# Altium PCB OneWifiGamePad.PcbDoc
Units mm, origin at the board's own origin, x right, y up, seen from the top; angles counter-clockwise.
Board outline 110.8 x 30 mm, 2 copper layers (Top Layer, Bottom Layer); 43 components, 31 nets, 135 pads, 62 vias.
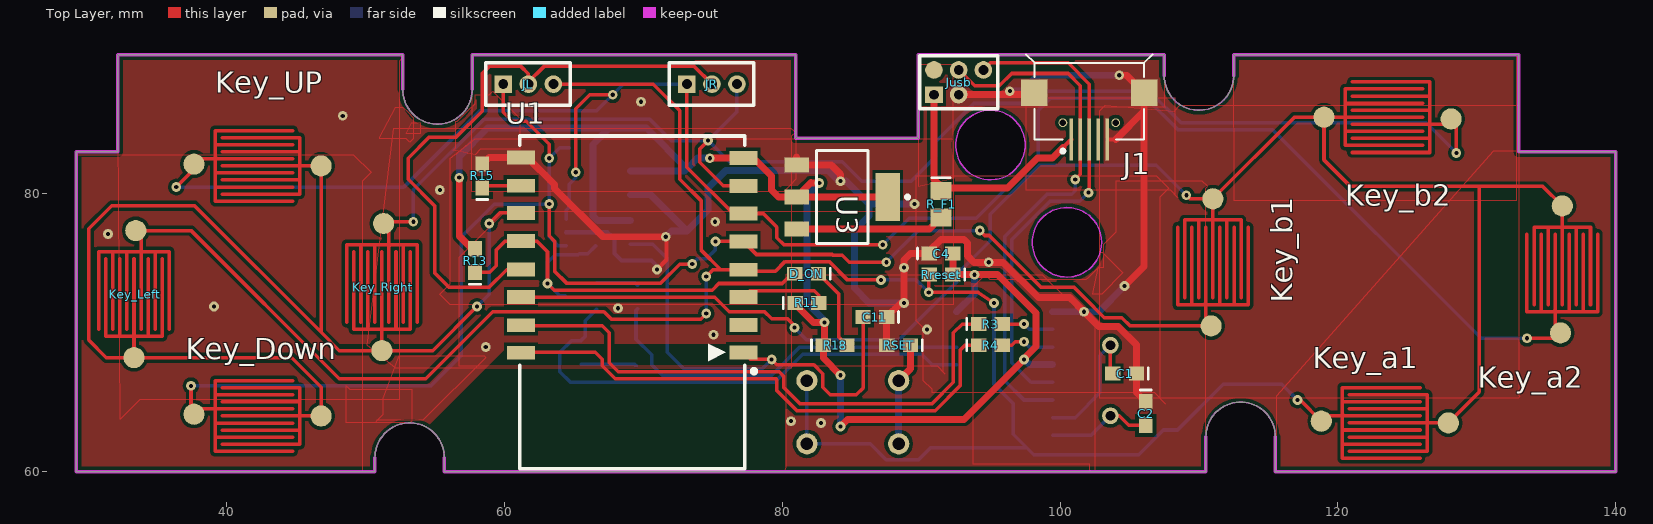
[diagram p0: Top Layer view]
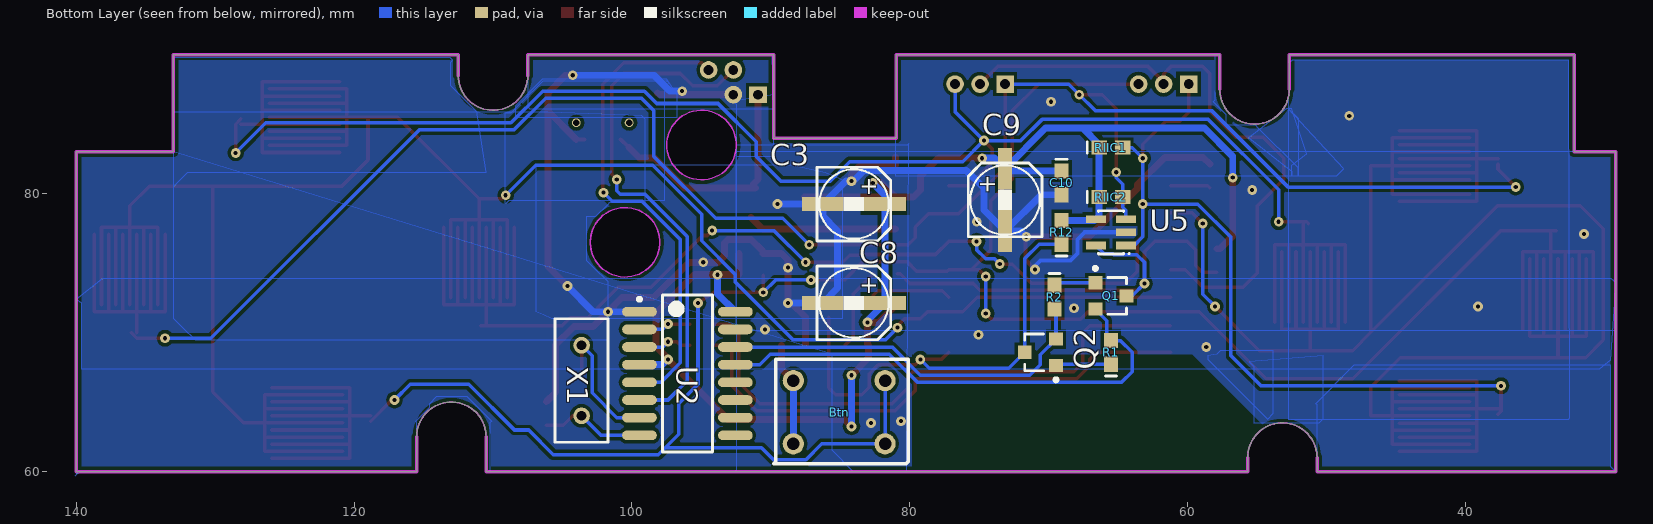
[diagram p1: Bottom Layer view, seen from below]

## Layer stack, top to bottom
Top Layer: signal copper 0.0356
Dielectric: dielectric 0.32, FR-4, Dk 4.8
Bottom Layer: signal copper 0.0356

## Board outline
29.2,83 32.2,83 32.2,90 52.7,90 52.7,87.5 ccw(c55.2,87.5) 57.7,87.5 57.7,90 81,90 81,84 89.8,84 89.8,90 107.5,90 107.5,88.5 ccw(c110,88.5) 112.5,88.5 112.5,90 133,90 133,83 140,83 140,60 115.5,60 115.5,62.5 ccw(c113,62.5) 110.5,62.5 110.5,60 55.7,60 55.7,61 ccw(c53.2,61) 50.7,61 50.7,60 29.2,60
cut-out: 97.988,76.5 98.036,76.01 98.179,75.539 98.411,75.104 98.724,74.724 99.104,74.411 99.539,74.179 100.01,74.036 100.5,73.988 100.99,74.036 101.461,74.179 101.896,74.411 102.276,74.724 102.589,75.104 102.821,75.539 102.964,76.01 103.012,76.5 102.964,76.99 102.821,77.461 102.589,77.896 102.276,78.276 101.896,78.589 101.461,78.821 100.99,78.964 100.5,79.012 100.01,78.964 99.539,78.821 99.104,78.589 98.724,78.276 98.411,77.896 98.179,77.461 98.036,76.99
cut-out: 92.488,83.5 92.536,83.01 92.679,82.539 92.911,82.104 93.224,81.724 93.604,81.411 94.039,81.179 94.51,81.036 95,80.988 95.49,81.036 95.961,81.179 96.396,81.411 96.776,81.724 97.089,82.104 97.321,82.539 97.464,83.01 97.512,83.5 97.464,83.99 97.321,84.461 97.089,84.896 96.776,85.276 96.396,85.589 95.961,85.821 95.49,85.964 95,86.012 94.51,85.964 94.039,85.821 93.604,85.589 93.224,85.276 92.911,84.896 92.679,84.461 92.536,83.99

## Design rules (kind name [scope] priority, off if disabled: settings)
Clearance [All] p1: gap=0.254
PolygonConnect [All] p1: connectstyle=Direct reliefconductorwidth=0.254 reliefentries=4 polygonreliefangle="90 Angle"
RoutingVias RoutingVias_VCC [InNetClass('VCCGND')] p1: holewidth=0.711 width=1.27 viastyle="Through Hole" minholewidth=0.3 minwidth=0.7 maxholewidth=0.711 maxwidth=1.27
RoutingVias RoutingVias_msg [All] p2: holewidth=0.3 width=0.7 viastyle="Through Hole" minholewidth=0.3 minwidth=0.7 maxholewidth=0.711 maxwidth=1.27
SilkscreenOverComponentPads [All] p1: minsilkscreentomaskgap=0.254
SolderMaskExpansion [All] p1: expansion=0.102
Width Width_GNDVCC [InNetClass('gndVcc')] p1: maxlimit=0.5 minlimit=0.3 preferedwidth=0.5
Width Width_ALL [All] p2: maxlimit=0.5 minlimit=0.254 preferedwidth=0.254
27 further rules are at their usual default settings.

## Classes and differential pairs
net class gndVcc: +3V3 GND USBVCC

## Components (designator, comment, footprint, x,y, rotation, side; value= is the part's Value field where it differs from the comment)
Btn "button" SW_6X6 88.392,66.548 r180 bottom locked
C1 "22p" 0603 104.648,67.056 r180 top
C2 "22p" 0603 106.172,64.174 r270 top
C3 "10uF" smd-ec-f5 81.788,79.248 r0 bottom
C4 "100n" 0603 91.44,75.692 r0 top
C8 "10V" smd-ec-f5 81.788,72.136 r0 bottom locked
C9 "10V" smd-ec-f5 73.152,81.788 r270 bottom
C10 "Cap" 0603 69.088,80.772 r270 bottom
C11 "104" 0603 86.68,71.12 r180 top
D_ON "LED2" 0603 81.771,74.232 r180 top
J1 "Micro-USB" MICRO_USB_B 102.108,89.408 r90 top
JL "CONJ-3" SIP-3 59.944,87.884 r90 top
JR "CONJ-3" SIP-3 73.152,87.884 r90 top
Jusb "CONJ-5" SIP-5 90.932,88.9 r0 top
Key_a1 "SW-PB" GAMEPAD 123.5,63.5 r180 top locked
Key_a2 "SW-PB" GAMEPAD 136.144,74.676 r270 top locked
Key_b1 "SW-PB" GAMEPAD 111,75.184 r270 top locked
Key_b2 "SW-PB" GAMEPAD 123.444,85.5 r0 top locked
Key_Down "SW-PB" GAMEPAD 42.38,64 r180 top locked
Key_Left "SW-PB" GAMEPAD 33.363,72.644 r90 top locked
Key_Right "SW-PB" GAMEPAD 51.2,73.152 r90 top locked
Key_UP "SW-PB" GAMEPAD 42.38,82 r180 top locked
Q1 "S8050" sot23-3 65.532,72.644 r270 bottom
Q2 "S8050" sot23-3 70.612,68.58 r90 bottom
R1 "10K" 0603 65.532,68.58 r90 bottom
R2 "10K" 0603 69.596,72.55 r270 bottom
R3 "470" 0603 94.996,70.612 r0 top
R4 "470" 0603 94.996,69.088 r0 top
R11 "10K" 0603 81.788,72.136 r0 top
R12 "10K" 0603 69.088,77.216 r90 bottom
R13 "20K" 0603 57.912,75.184 r90 top
R15 "1K" 0603 58.42,81.28 r90 top
R18 "10K" 0603 83.82,69.088 r0 top
R_F1 "0.5A" 0805 91.44,79.248 r270 top
RIIC1 "10k" 0603 65.532,83.312 r180 bottom
RIIC2 "10k" 0603 65.532,79.756 r180 bottom
Rreset "10k" 0603 91.44,74.168 r180 top
RSET "Res2" 0603 88.392,69.088 r180 top
U1 "ESP-12" ESP_12 77.216,68.58 r180 top locked
U2 "CH340" SOP127P762-16M 96.012,67.056 r180 bottom locked
U3 "AMS1117" SOT-223 84.328,79.756 r270 top
U5 "at24c02" sot-23-5 65.532,77.216 r90 bottom
X1 "osc-2" RAD-0.2 103.632,66.548 r90 bottom locked

## Footprints (in the part's own frame and the unit in brackets; to place one, negate y for a bottom-side part, rotate by r counter-clockwise, add the part's x,y. Pads: shape width x height; smd on the part's side, far side on the other; paste and mask are expansions set on the pad)
0603 [mm] "Chip Capacitor; Body 1.6 x 0.8 mm (LxW typ)"
  rect 1.1x1 smd: 1(-0.85,0) 2(0.85,0)
  silkscreen extent -1.7,-0.4 -1.7,0.4
0805 [mm] "Chip Capacitor; Body 2.0 x 1.2 mm (LxW typ)"
  rect 1.3x1.5 smd: 1(-0.95,0) 2(0.95,0)
  silkscreen extent -1.9,-0.65 -1.9,0.65
ESP_12 [mm]
  rect 2x1 smd: 1(0,0) 2(0,-1.97) 3(0,-3.97) 4(0,-5.94) 5(0,-7.98) 6(0,-9.99) 7(0,-11.98) 8(0,-13.99) 9(16,-14.03) 10(16,-11.99) 11(16,-10.03) 12(16,-8.01) 13(16,-5.95) 14(16,-3.97) 15(16,-1.95) 16(16,0.03)
  silkscreen extent -0.91,-15.57 16.08,8.37
GAMEPAD [mil] "game pad"
  round 60 smd: 1(-175,0) 2(185,-5)
  Top Layer lines w10: 185,-20 125,-20 ; 125,50 125,100 -95,100 ; 125,0 125,-35 ; 125,-15 125,60 -95,60 ; 120,20 -95,20 ; 105,80 -90,80 -115,80 -115,-40 ; 105,40 -115,40 ; 105,0 -115,0 -175,0 ; 105,-40 -115,-40 ; 105,-80 -115,-80 -115,-40 ; -95,-20 120,-20 125,-25 125,-60 ; -95,-60 125,-60 ; -95,-100 125,-100 125,-60
MICRO_USB_B [mm] "5P 贴片 带定位柱"
  rect 3x0.25 smd: 1(-5.508,1.3) 2(-5.508,0.65) 3(-5.508,0) 4(-5.508,-0.65) 5(-5.508,-1.3)
  rect 1.9x1.9 smd: 6(-2.15,3.95) 6(-2.15,-3.95)
  round 0.635 hole 0.457 unplated: MH1(-4.3,1.9) MH2(-4.3,-1.9)
  silkscreen extent -6.47,-4.57 0.63,4.57
RAD-0.2 [mm] "Radial Cap, Thru-Hole; 2 Leads; 0.2 in Pin Spacing"
  round 1.2 hole 0.7: 1(-2.54,0) 2(2.54,0)
  silkscreen extent -4.44,-1.91 4.44,1.91
SIP-3 [mm] "sip-3"
  rect 1.27x1.27 hole 0.7: 1(0,0)
  round 1.27 hole 0.7: 2(0,-1.8) 3(0,-3.6)
  silkscreen extent -1.52,-4.83 1.52,1.27
SIP-5 [mm] "SIP5"
  rect 1.27x1.2 hole 0.7: 1(0,-1.778)
  round 1.27 hole 0.7: 2(1.778,0) 3(3.556,0) 5(1.778,-1.778)
  round 1.27 smd: 4(0,0)
  silkscreen extent -1.02,-2.79 4.57,1.02
smd-ec-f5 [mm]
  rect 3x1 smd: 1(0,0) 2(4.477,0)
  silkscreen extent -0.41,-2.65 4.89,2.66
SOP127P762-16M [mm] "16-Pin Small Outline Package 1.27 mm Pitch"
  oval 2.5x0.7 smd: 1(-3.45,4.445) 2(-3.45,3.175) 3(-3.45,1.905) 4(-3.45,0.635) 5(-3.45,-0.635) 6(-3.45,-1.905) 7(-3.45,-3.175) 8(-3.45,-4.445) 9(3.45,-4.445) 10(3.45,-3.175) 11(3.45,-1.905) 12(3.45,-0.635) 13(3.45,0.635) 14(3.45,1.905) 15(3.45,3.175) 16(3.45,4.445)
  silkscreen extent -3.57,-5.65 1.8,5.65, body extent -2.85,-5.65 2.85,5.65, height 2.2
sot23-3 [mm] "SOT-23; 3 Leads; Body 3.0 x 2.5 mm, inc. leads (LxW max)"
  rect 0.95x1 smd: 1(-0.95,-1.125) 2(0.95,-1.125) 3(0,1.125)
  silkscreen extent -2.1,-1.25 1.33,1.13
sot-23-5 [mm] "SOT-23/SC-74A; 5 Leads; Body 3 x 3.1 mm, inc. leads (LxW max)"
  rect 0.55x1.45 smd: 1(-0.95,-1.075) 2(0,-1.075) 3(0.95,-1.075) 4(0.95,1.075) 5(-0.95,1.075)
  silkscreen extent -1.57,-1.35 1.55,0.9
SOT-223 [mm] "SOT-223/SC-73; 4 Leads; Body 6.7 x 7.3 mm, inc. leads (LxW max)"
  rect 1.1x1.75 smd: 1(-2.3,-3.275) 2(0,-3.275) 3(2.3,-3.275)
  rect 3.45x1.75 smd: 4(0,3.275)
  silkscreen extent -3.35,-1.85 3.35,4.83
SW_6X6 [mm] "6x6 touch switch"
  round 1.524 hole 0.9: 1(0,0) 2(0,-4.55) 3(6.6,-4.55) 4(6.6,0)
  silkscreen extent -1.4,-5.97 8.25,1.52

## Part data
C1 C2 C4 C11: library part Cap, "Capacitor"
C3 C8 C9: library part "Cap Pol1", "Polarized Capacitor (Radial)"
C10: "Capacitor"
D_ON: "Typical RED, GREEN, YELLOW, AMBER GaAs LED"
Key_a1 Key_a2 Key_b1 Key_b2 Key_Down Key_Left Key_Right Key_UP: "Switch"
Q1 Q2: library part NPN_23-3
R1 R2 R3 R4 R11 R12 R13 R15 R18 R_F1 RIIC1 RIIC2 Rreset: library part Res2, "Resistor"
RSET: "Resistor"
U2: library part RS232, "RS232"

## Via types
v1: diameter 0.7, hole 0.3, Top Layer to Bottom Layer, 62 vias

## Nets (pads, with @x,y where several pads share a name; then routed paths per layer and width w, separated by ;. In a path a pad name is that pad's centre, name@x,y a point inside that pad or via, vN(x,y) a via of type N, cw(c..) or ccw(c..) an arc to the next point about the centre after c; other vN are vias at no path point)
+3V3: C3.1 C4.2 C8.1 C9.1 C10.1 R11.1 R12.2 R13.2 R18.1 RIIC1.1 RIIC2.1 Rreset.1 U1.8 U2.4 U2.16 U3.2 U3.4 U5.4 | length 112.8
  Top Layer w0.5: v1(56.769,81.153) 56.769,76.962 57.697,76.034 R13.2 ; v1@74.823,82.57 U1.8 77.958,82.57 79.248,81.28 79.248,80.264 79.756,79.756 U3.2 ; R11.1 80.938,72.073 82.272,70.739 v1(83.058,70.739) 83.058,69.176 R18.1 82.97,68.16 v1(84.201,66.929) ; v1@82.337,80.772 v1(82.677,80.772) 82.108,80.772 82.089,80.792 U3.2 ; v1(84.201,63.246) 84.713,63.758 93.095,63.758 v1(97.409,68.072) 97.409,68.134 98.263,68.988 98.263,71.417 95.512,74.168 v1(93.853,74.168) Rreset.1 C4.2 ; U3.4 U3.2
  Bottom Layer w0.5: v1(56.769,81.153) 56.769,82.677 58.801,84.709 67.564,84.709 ; R12.2 66.707,78.066 66.382,78.391 66.382,80.264 66.382,82.296 66.382,83.527 67.564,84.709 ; C10.1 C9.1@72.986,81.622 ; v1(74.803,82.55) 73.914,82.55 C9.1 70.231,84.709 67.564,84.709 ; v1(82.677,80.772) 81.788,79.883 C3.1 C8.1 83.058,70.866 v1(83.058,70.739) ; v1(84.201,63.246) v1(84.201,66.929) ; U2.16 93.853,72.792 v1(93.853,74.168) ; v1(97.409,68.072) 97.79,67.691 U2.4
ADC: U1.2
D2: Btn.3 Btn.4 JL.3 Key_a1.2 Key_Left.2 Rreset.2 U1.4 | length 153.9
  Top Layer w0.254: Key_Left.2 37.465,77.343 48.133,66.675 54.356,66.675 59.182,71.501 67.183,71.501 67.723,70.961 74.136,70.961 v1(74.549,71.374) ; JL.3 70.739,87.884 72.644,85.979 72.644,81.026 74.168,79.502 74.168,75.946 75.594,74.52 ; v1(74.549,74.041) 75.028,74.52 75.594,74.52 ; v1(87.122,73.787) 84.709,73.787 83.383,75.113 80.214,75.113 79.523,74.422 77.314,74.422 U1.4 75.594,74.52 ; Rreset.2@90.551,74.129 v1(90.551,72.898) 94.107,72.898 v1(95.25,72.136) ; v1(117.094,65.151) 117.277,65.151 Key_a1.2
  Bottom Layer w0.254: v1(74.549,71.374) v1(74.549,74.041) ; Btn.4 Btn.3 86.338,61.998 87.481,60.855 89.818,60.855 90.685,61.722 97.591,61.722 ; v1(87.122,73.787) 89.662,73.787 v1(90.551,72.898) ; v1(95.25,72.136) 95.25,66.294 96.647,64.897 96.647,62.676 98.109,61.214 105.664,61.214 107.442,62.992 108.458,62.992 111.76,66.294 115.951,66.294 v1(117.094,65.151)
D3: Key_a1.1 Key_a2.1 Key_b1.1 Key_b2.1 U1.14 | length 109.3
  Top Layer w0.254: U1.14 75.151,72.55 76.2,71.501 78.74,71.501 79.248,70.993 80.391,70.993 80.899,70.485 v1(80.899,70.358) ; v1(109.093,79.883) 109.347,79.629 Key_b1.1 116.871,85.5 Key_b2.1 118.999,82.423 120.904,80.518 130.175,80.518 ; Key_a1.1 130.175,65.73 130.175,80.518 ; Key_a2.1 134.747,80.518 130.175,80.518
  Bottom Layer w0.254: v1(80.899,70.358) 81.788,69.469 88.392,69.469 92.583,73.66 92.583,74.201 94.98,76.597 94.98,78.513 98.503,82.036 100.959,82.036 100.965,82.042 ; 100.424,82.042 106.934,82.042 v1(109.093,79.883)
D4: JL.2 JR.2 U1.13 | length 44.4
  Top Layer w0.254: U1.13 60.179,74.53 58.909,73.26 56.026,73.26 54.991,74.295 54.991,79.121 53.086,81.026 53.086,82.55 54.61,84.074 56.555,84.074 58.42,85.939 58.42,88.646 58.928,89.154 61.214,89.154 61.744,88.624 JL.2@61.744,88.033 ; JL.2 JL.2@61.744,88.033 ; JR.2 74.952,87.893 73.691,89.154 62.865,89.154 JL.2@61.744,88.033
D5: JL.1 Key_b1.2 Key_Down.2 RIIC1.2 U1.5 U5.1 | length 113
  Top Layer w0.254: v1(37.465,66.167) 37.465,64.343 Key_Down.2 ; JL.1 59.944,85.852 60.579,85.217 61.595,85.217 63.246,83.566 v1(63.246,82.55) ; v1(63.246,79.248) 63.246,76.962 63.627,76.581 63.627,74.422 64.483,73.566 71.28,73.566 72.644,74.93 v1(73.533,74.93) ; v1(75.205,76.56) U1.5 78.155,75.621 83.594,75.621 ; 83.649,75.565 84.328,75.565 84.836,75.057 v1(87.503,75.057) ; v1(94.234,77.343) 94.588,76.989 94.896,76.989 98.606,73.279 100.983,73.279 102.458,71.804 102.458,71.786 103.175,71.069 104.449,71.069 105.032,70.485 Key_b1.2
  Bottom Layer w0.254: v1(37.465,66.167) 54.737,66.167 56.896,68.326 56.896,76.853 59.291,79.248 v1(63.246,79.248) ; U5.1 63.868,76.266 63.246,76.888 v1(63.246,79.248) ; RIIC1.2 64.008,83.312 v1(63.246,82.55) v1(63.246,79.248) ; v1(73.533,74.93) 73.914,75.311 74.549,75.311 75.205,75.967 v1(75.205,76.56) ; v1(87.503,75.057) 89.789,77.343 v1(94.234,77.343)
D6: JR.1 Key_a2.2 Key_UP.2 RIIC2.2 U1.6 U5.3 | length 139
  Top Layer w0.254: v1(36.407,80.476) 37.681,81.75 Key_UP.2 ; v1(65.151,81.534) 65.151,86.106 66.167,87.122 v1(67.818,87.122) ; JR.1 73.152,81.902 76.484,78.57 U1.6 78.656,78.57 79.629,77.597 79.629,76.835 80.137,76.327 v1(87.249,76.327) ; v1(133.604,69.596) 135.636,69.596 Key_a2.2
  Bottom Layer w0.254: v1(36.407,80.476) 52.79,80.476 58.293,85.979 66.675,85.979 v1(67.818,87.122) 68.58,87.884 JR.1 ; U5.3 64.457,78.808 64.682,79.033 RIIC2.2 ; 64.682,80.264 RIIC2.2 ; v1(65.151,81.534) 65.151,81.153 64.682,80.684 RIIC2.2 ; v1(87.249,76.327) 89.154,78.232 93.98,78.232 98.425,82.677 98.425,85.979 99.314,86.868 106.216,86.868 108.502,84.582 115.316,84.582 130.302,69.596 v1(133.604,69.596)
D7: JR.3 Key_b2.2 Key_Right.2 U1.7 | length 101.8
  Top Layer w0.254: Key_Right.2 51.454,77.978 v1(53.467,77.978) ; v1(74.676,83.82) 74.072,83.216 74.072,82.247 75.759,80.56 U1.7 ; Key_b2.2 128.524,84.992 v1(128.524,82.931)
  Bottom Layer w0.254: v1(53.467,77.978) 53.467,80.267 58.54,85.34 70.492,85.34 72.012,83.82 v1(74.676,83.82) ; JR.3 76.752,85.896 v1(74.676,83.82) ; v1(128.524,82.931) 126.365,85.09 108.712,85.09 106.465,87.337 106.426,87.376 99.104,87.376 98.215,86.487 93.806,86.487 91.059,83.74 91.059,82.677 89.281,80.899 85.725,80.899 84.328,82.296 76.2,82.296 v1(74.676,83.82)
D8: D_ON.2 Q1.3 R13.1 U1.12 U5.5 | length 35.1
  Top Layer w0.254: R13.1 58.967,74.334 59.436,74.803 59.436,75.946 60.08,76.59 U1.12 62.348,76.59 63.119,75.819 v1(63.119,73.533) 63.594,73.058 74.963,73.058 75.438,73.533 80.01,73.533 80.709,74.232 D_ON.2
  Bottom Layer w0.254: Q1.3 64.008,72.644 v1(63.119,73.533) 63.119,75.057 63.672,75.61 65.34,75.61 65.396,75.666 66.007,75.666 U5.5
D9: Key_Down.1 Key_Left.1 Key_Right.1 Key_UP.1 U1.11 | length 83.4
  Top Layer w0.254: Key_Down.1 46.825,66.078 44.704,68.199 Key_Left.1 31.369,68.199 30.099,69.469 30.099,77.47 31.75,79.121 37.719,79.121 46.825,70.015 ; Key_UP.1 46.825,70.015 ; v1(58.039,71.882) 54.864,68.707 Key_Right.1 48.133,68.707 46.825,70.015 ; v1(58.928,77.851) 59.687,78.61 U1.11
  Bottom Layer w0.254: v1(58.039,71.882) 58.928,72.771 v1(58.928,77.851)
D+: J1.3 Jusb.3 U2.5 | length 35.6
  Top Layer w0.254: Jusb.3 94.996,89.408 100.584,89.408 102.108,87.884 J1.3 102.108,80.137 v1(102.044,80.073)
  Bottom Layer w0.254: U2.5 97.917,66.421 96.52,67.818 96.52,76.701 99.275,79.456 101.427,79.456 v1(102.044,80.073)
D-: J1.2 Jusb.2 U2.6 | length 38.6
  Top Layer w0.254: Jusb.2 93.853,87.757 95.631,87.757 96.52,88.646 100.584,88.646 101.458,87.772 J1.2 101.458,81.392 v1(101.092,81.026)
  Bottom Layer w0.254: U2.6 97.409,65.151 96.012,66.548 96.012,76.911 99.065,79.964 100.838,79.964 101.092,80.218 v1(101.092,81.026) v1@101.154,81.026
DTR: Q1.2 R1.2 U2.13 | length 36
  Bottom Layer w0.254: Q1.2 65.825,70.862 65.825,69.723 R1.2 64.858,69.43 64.008,68.58 64.008,67.183 64.77,66.421 73.069,66.421 79.458,66.421 81.49,68.453 90.043,68.453 90.805,67.691 U2.13
EN: R11.2 U1.3 | length 6.3
  Top Layer w0.254: U1.3 77.683,73.017 82.304,73.017 82.638,72.683 R11.2
GND: C1.1 C2.1 C3.2 C4.1 C8.2 C9.2 C10.2 C11.1 J1.5 J1.6 Jusb.5 R15.2 RSET.2 U1.9 U2.1 U3.1 U5.2 | length 141.5
  Top Layer w0.3: v1(70.993,74.549) 71.688,75.244 71.688,76.836 v1(71.628,76.896) ; J1.5 104.013,83.9
  Top Layer w0.5: R15.2 58.9,82.61 U1.9 61.662,82.61 63.627,80.645 63.627,80.372 67.102,76.896 v1(71.628,76.896) ; 81.053,82.65 U3.1 83.539,82.056 84.201,81.394 v1(84.201,80.899) ; RSET.2@87.53,69.1 C11.1 88.546,72.136 v1(88.773,72.136) 88.773,75.223 89.242,75.692 C4.1 90.59,75.858 91.428,76.696 93.103,76.696 93.345,76.454 93.345,75.53 93.818,75.057 95.906,75.057 98.446,72.517 100.711,72.517 v1(101.727,71.501) 102.79,70.438 104.187,70.438 105.498,69.127 C1.1 105.498,65.698 C2.1 ; Jusb.5 98.022,87.122 J1.6@98.158,87.258 ; v1@96.393,87.122 v1(96.393,87.376) ; 104.013,83.9 106.058,85.945 ; v1(104.267,88.519) 104.797,88.519 106.058,87.258 106.058,85.945 ; v1(104.648,73.356) 106.058,74.766 106.058,85.945
  Bottom Layer w0.3: U5.2 67.437,77.216 67.945,76.708 67.945,75.692 68.453,75.184 70.612,75.184 70.993,74.803 v1(70.993,74.549)
  Bottom Layer w0.5: C10.2 70.541,79.922 C9.2 ; v1(71.628,76.896) 72.043,77.311 C9.2 ; v1(88.773,72.136) C8.2 85.199,73.202 85.199,77.311 86.265,78.377 C3.2 ; v1(89.535,79.248) C3.2 ; v1(96.393,87.376) 97.282,87.376 98.425,88.519 v1(104.267,88.519) ; U2.1 v1(101.727,71.501) 102.793,71.501 v1(104.648,73.356) ; C9.2 74.676,78.835 74.676,80.391 75.946,81.661 83.312,81.661 84.074,80.899 84.614,80.899 C3.2
  other v1: 82.804,63.5 80.645,63.627 58.674,68.961 75.057,69.85 90.424,70.231 68.199,71.755 39.116,71.882 88.773,74.676 94.869,75.057 31.496,77.089 75.184,77.978 55.372,80.264 48.387,85.598 69.85,86.614
ID: Jusb.4
NetBtn_1: Btn.1 Btn.2 RSET.1 | length 7.4
  Top Layer w0.5: Btn.1 89.242,67.398 RSET.1
  Bottom Layer w0.5: Btn.2 Btn.1
NetD_ON_1: D_ON.1 R18.2 | length 6
  Top Layer w0.254: D_ON.1 84.074,72.779 84.074,69.684 R18.2
NetQ1_1: Q1.1 R2.1 | length 3
  Bottom Layer w0.254: Q1.1 69.402,73.594 R2.1
NetQ2_1: Q2.1 R1.1 | length 4
  Bottom Layer w0.254: R1.1 69.387,67.73 Q2.1
NetR3_2: R3.2 U2.2 | length 3.8
  Top Layer w0.254: R3.2 v1(97.409,70.612)
  Bottom Layer w0.254: v1(97.409,70.612) 97.79,70.231 U2.2
NetR4_2: R4.2 U2.3 | length 3.9
  Top Layer w0.254: R4.2 96.52,69.088 96.774,69.342 v1(97.409,69.342)
  Bottom Layer w0.254: v1(97.409,69.342) 97.79,68.961 U2.3
NetR15_1: R15.1 U1.10 | length 2.9
  Top Layer w0.254: R15.1 58.56,80.57 U1.10
RESET: C11.2 Q2.3 R12.1 U1.1 | length 33.8
  Top Layer w0.254: U1.1 77.724,68.072 v1(79.248,68.072) 79.629,67.691 82.296,67.691 82.935,67.052 82.935,66.071 82.931,66.067 83.466,65.532 85.344,65.532 85.83,66.018 C11.2
  Bottom Layer w0.254: R12.1 70.7,76.366 71.737,75.329 Q2.3 72.881,67.437 78.613,67.437 v1(79.248,68.072)
RTS: Q2.2 R2.2 U2.14 | length 27.6
  Bottom Layer w0.254: R2.2 69.487,71.591 Q2.2 70.612,68.405 70.612,67.691 71.374,66.929 79.248,66.929 81.28,68.961 U2.14
RX: R3.1 U1.15 | length 41.4
  Top Layer w0.254: U1.15@61.261,70.485 67.056,70.485 67.564,69.977 67.564,67.818 68.199,67.183 79.786,67.183 80.137,66.832 80.137,66.04 81.28,64.897 90.805,64.897 92.329,66.421 92.329,69.977 92.964,70.612 R3.1
TX: R4.1 U1.16 | length 38.8
  Top Layer w0.254: U1.16@61.246,68.58 66.548,68.58 67.056,68.072 67.056,67.608 67.989,66.675 79.575,66.675 79.629,66.621 79.629,65.83 81.07,64.389 91.015,64.389 92.837,66.211 92.837,68.763 93.162,69.088 R4.1
USBP: J1.1 Jusb.1 R_F1.1 | length 18.1
  Top Layer w0.3: 100.22,83.312 J1.1
  Top Layer w0.5: Jusb.1 90.932,81.006 91.336,80.602 91.125,80.391 96.231,80.391 98.39,82.55 99.458,82.55 100.22,83.312
USBVCC: R_F1.2 U3.3 | length 10.7
  Top Layer w0.5: U3.3 90.598,77.456 R_F1.2
XI: C1.2 U2.7 X1.2 | length 10.1
  Top Layer w0.254: X1.2@103.632,69.215 X1.2 103.632,67.222 C1.2
  Bottom Layer w0.254: U2.7 101.092,63.881 102.87,65.659 102.87,68.326 X1.2
XO: C2.2 U2.8 X1.1 | length 7.6
  Top Layer w0.254: X1.1 104.267,64.008 104.951,63.324 C2.2
  Bottom Layer w0.254: U2.8 102.235,62.611 X1.1
pads on no net: J1.4 J1.MH1 J1.MH2 U2.9 U2.10 U2.11 U2.12 U2.15

## Polygon pours and split planes (outlines as drawn)
GND on Top Layer "TopLayer-No Net" (solid, shelved): 52.451,68.319 58.554,68.319 58.674,68.199 54.15,63.675 54.069,63.675 50.848,63.675 50.8,63.627 51.308,64.135 51.308,65.278
GND on Top Layer "TopLayer-No Net" (solid, shelved): 115.57,65.405 115.57,60.07 115.5,60 140,60 140,83 139.942,83.058 131.318,83.058 131.191,83.058
GND on Top Layer "TopLayer-No Net" (solid, shelved): 112.5,90 133,90 132.842,89.842 132.842,79.502 112.522,79.502
GND on Top Layer "TopLayer-No Net" (solid, shelved): 108.204,85.945 108.619,86.36 133,86.36 133,65.501 133.096,65.405 132.97,65.279 102.87,65.279 102.87,85.979 103.251,86.36
GND on Top Layer "TopLayer-No Net" (solid, shelved): 97.536,86.868 97.536,80.293 107.919,80.293 108.432,79.756 108.303,79.89 108.303,86.868
GND on Top Layer "TopLayer-No Net" (solid, shelved): 90.17,70.358 89.662,70.866 89.662,81.28 106.934,81.28 107.823,80.391 107.188,79.756 107.188,68.961 107.188,65.278 107.569,64.897 106.807,65.659 90.812,65.659 90.812,65.906 90.17,66.548
GND on Top Layer "TopLayer-No Net" (solid, shelved): 92.329,81.102 92.329,89.281 89.927,89.281 89.8,89.408 89.789,89.397 89.789,80.518
GND on Top Layer "TopLayer-No Net" (solid, shelved): 89.916,89.916 90,90 107.5,90 107.5,86.302 107.58,86.222 107.569,86.233 89.8,86.233
GND on Top Layer "TopLayer-No Net" (solid, shelved): 102.743,74.676 102.892,74.825 102.892,75.774 103.042,75.774 104.521,74.295 102.997,72.771 102.362,72.771
GND on Top Layer "TopLayer-No Net" (solid, shelved): 102.108,60.579 102.108,60.127 102.235,60 110.5,60 110.5,80.401 110.617,80.518 110.236,80.899 104.013,80.899 104.013,77.216 103.251,76.454 103.124,76.327 103.124,74.676 102.743,74.676 101.981,73.914 101.854,73.787 101.346,73.787 94.996,73.787 94.615,74.168 93.726,73.279 93.726,60.579
GND on Top Layer "TopLayer-No Net" (solid, shelved): 80.309,60.325 80.309,74.209 80.333,74.232 80.398,74.168 91.138,74.168 98.705,74.168 98.966,73.914 102.489,70.485 102.489,60 80.179,60
GND on Top Layer "TopLayer-No Net" (solid, shelved): 56.769,67.564 56.769,75.438 56.896,75.565 60.071,78.74 91.567,78.74 91.567,67.183 91.694,67.056 91.186,67.564 57.15,67.564
GND on Top Layer "TopLayer-No Net" (solid, shelved): 57.912,83.947 92.202,83.947 92.329,83.82 92.329,72.009 56.134,72.009 55.372,72.771 56.134,73.533 56.134,82.55
GND on Top Layer "TopLayer-No Net" (solid, shelved): 56.33,83.131 56.515,83.315 56.515,85.217 56.642,85.217 57.531,86.106 57.912,86.487 57.912,87.122 58.928,87.122 59.182,87.376 61.132,85.426 61.132,83.185 58.293,83.185 57.912,82.804
GND on Top Layer "TopLayer-No Net" (solid, shelved): 57.7,90 81,90 81,81.021 80.539,80.56 80.116,80.137 57.658,80.137
GND on Top Layer "TopLayer-No Net" (solid, shelved): 48.641,66.167 48.895,65.913 53.34,65.913 53.34,63.627 53.213,63.5 48.641,63.5
GND on Top Layer "TopLayer-No Net" (solid, shelved): 53.34,85.09 53.975,85.09 53.975,84.328 52.959,84.328
GND on Top Layer "TopLayer-No Net" (solid, shelved): 52.197,86.233 52.705,86.233 53.086,85.852 53.467,85.471 53.467,83.947 53.213,83.693 52.959,83.947 51.054,83.947 51.054,84.074
GND on Top Layer "TopLayer-No Net" (solid, shelved): 52.07,84.709 80.619,84.709 81,84.402 80.645,84.117 80.645,67.437 52.197,67.437 50.165,69.072
GND on Top Layer "TopLayer-No Net" (solid, shelved): 29.2,82.804 49.149,82.804 50.419,81.534 49.784,80.899 49.784,60 29.2,60
GND on Top Layer "TopLayer-No Net" (solid, shelved): 32.2,89.662 32.2,90 52.489,90 52.7,89.789 52.451,89.54 52.451,65.151 33.782,65.151 32.385,63.754
GND on Bottom Layer "TopLayer-No Net" (solid, shelved): 58.554,68.319 58.554,68.079 54.253,63.778 53.848,64.183 53.848,68.707 57.658,68.707 57.912,68.453
GND on Bottom Layer "TopLayer-No Net" (solid, shelved): 133,83 140,83 140,59.771 140.081,59.69 139.771,60 115.5,60 115.5,63.557 115.57,63.627 114.554,64.643 114.554,64.77 114.554,64.897 114.046,65.405 112.268,65.405 111.887,65.405 110.109,63.627 110.236,63.5 110.236,60 84.074,60 85.598,61.524 85.598,68.453
GND on Bottom Layer "TopLayer-No Net" (solid, shelved): 111.125,85.725 111.125,85.852 112.141,86.868 113.03,87.757 113.03,87.884 113.03,89.47 112.888,89.612 113.066,89.789 133,89.789 133,80.549 132.969,80.518 131.953,81.534 110.49,81.534
GND on Bottom Layer "TopLayer-No Net" (solid, shelved): 106.045,85.852 133,85.852 133,71.024 132.334,70.358 131.445,69.469 101.727,69.469 101.727,73.66 102.743,74.676 103.251,75.184 103.251,78.359 102.616,78.359 101.727,79.248 101.6,79.375 99.06,79.375 99.06,85.344 99.314,85.598
GND on Bottom Layer "TopLayer-No Net" (solid, shelved): 88.588,82.042 106.934,82.042 106.934,71.538 106.392,71.307 105.781,71.047 84.836,71.047 84.836,80.978 86.087,81.51
GND on Bottom Layer "TopLayer-No Net" (solid, shelved): 97.663,87.376 97.663,79.502 108.858,79.502 109.093,79.267 109.131,79.305 109.131,85.825 108.706,85.825 107.961,86.57 106.393,88.138 101.981,88.138 97.536,88.138 97.409,88.011
GND on Bottom Layer "TopLayer-No Net" (solid, shelved): 96.774,87.122 96.774,85.471 96.795,85.45 108.352,85.45 108.352,86.339 107.188,87.503 106.426,88.265 99.695,88.265 97.536,88.265
GND on Bottom Layer "TopLayer-No Net" (solid, shelved): 92.71,86.647 92.496,86.448 92.496,82.677 89.925,82.677 89.789,82.804 89.801,82.815 89.801,87.122
GND on Bottom Layer "TopLayer-No Net" (solid, shelved): 89.916,89.916 90,90 107.5,90 107.5,86.262 107.471,86.233 107.344,86.106 89.8,86.106
GND on Bottom Layer "TopLayer-No Net" (solid, remove dead copper, shelved): 80.088,83.584 80.176,83.5 92.483,83.5 92.483,60.095 92.583,60 80.221,60
GND on Bottom Layer "TopLayer-No Net" (solid, shelved): 52.528,86.106 52.903,86.106 55.626,84.006 52.528,81.616 52.528,81.28 52.528,82.029 51.435,82.873
GND on Bottom Layer "TopLayer-No Net" (solid, shelved): 52.76,86.115 52.07,85.425 52.07,81.28 52.07,81.854 54.925,84.709 55.122,84.906 57.22,84.906 57.22,85.668 58.166,86.614 58.039,86.741 58.039,90 81,90 81.053,89.947 81.053,81.28 49.276,81.28 48.768,81.788
GND on Bottom Layer "TopLayer-No Net" (solid, shelved): 55.576,67.895 55.245,67.564 55.245,63.5 50.546,63.5 50.419,63.627 50.261,63.785 50.261,68.319
GND on Bottom Layer "TopLayer-No Net" (solid, shelved): 50.7,60 50.7,64.797 50.8,64.897 48.01,67.687 29.588,67.687 29.588,60.388 29.2,60
GND on Bottom Layer "TopLayer-No Net" (solid, shelved): 29.2,83 92.526,83 92.536,83.01 92.532,83.005 92.532,70.18 29.276,70.18 29.2,70.104
GND on Bottom Layer "TopLayer-No Net" (solid, shelved): 32.588,89.612 52.496,89.612 52.7,89.408 52.76,89.348 52.76,63.778 32.594,63.778 32.501,63.87
GND on Bottom Layer "TopLayer-No Net" (solid, shelved): 29.588,68.01 30.41,67.364 139.612,67.364 139.612,72.111 140,72.417 138.095,73.914 102.743,73.914 29.581,73.914 29.2,73.615
GND on Top Layer "TopLayer-No Net" (solid, remove dead copper, pour order 1000): 25.527,94.615 25.527,69.215 140.716,69.215 142.621,71.12 141.605,72.136 141.605,94.234 26.543,94.234 26.162,94.615
GND on Top Layer "TopLayer-No Net" (solid, remove dead copper, pour order 1001): 80.264,69.215 80.264,58.928 80.137,58.801 84.709,54.229 144.272,54.229 144.272,68.707 143.256,69.723
GND on Top Layer "TopLayer-No Net" (solid, remove dead copper, pour order 1002): 54.483,63.246 64.262,73.025 64.262,79.756 29.083,79.756 26.67,77.343 28.194,75.819 28.194,57.912 50.546,57.912 51.181,57.277
GND on Bottom Layer "TopLayer-No Net" (solid, remove dead copper, pour order 1000): 144.399,94.996 143.002,93.599 24.765,93.599 24.765,59.563 28.829,55.499 32.766,59.436 51.435,59.436 51.435,61.341 52.578,62.484 52.959,62.865 54.102,62.865 59.309,68.072 59.69,68.453 79.883,68.453 79.883,59.309 81.28,57.912 81.407,57.785 142.367,57.785 142.367,93.472 142.24,93.599
GND on Bottom Layer "TopLayer-No Net" (solid, remove dead copper, pour order 1001): 96.266,78.994 86.995,78.994 86.995,77.906 86.178,77.089 86.233,77.034 86.233,72.771 88.392,72.771 90.551,70.612 90.678,70.485 94.615,70.485 94.615,73.159 95.624,74.168 96.139,74.683 96.139,77.978

## Keep-outs
Keep-Out Layer:
  circle w0.1: c95,83.5 r2.5
  circle w0.1: c100.5,76.5 r2.5
  lines w0.1: 50.7,61 cw(c53.2,61) 55.7,61 ; 52.7,87.5 ccw(c55.2,87.5) 57.7,87.5 ; 107.5,88.5 ccw(c110,88.5) 112.5,88.5 ; 110.5,62.5 cw(c113,62.5) 115.5,62.5
  lines w0.254: 50.7,61 50.7,60 29.2,60 29.2,83 32.2,83 32.2,90 52.7,90 52.7,87.5 ; 55.7,61 55.7,60 110.5,60 110.5,62.5 ; 57.7,87.5 57.7,90 81,90 81,84 89.8,84 89.8,90 107.5,90 107.5,88.5 ; 112.5,88.5 112.5,90 133,90 133,83 140,83 140,60 115.5,60 115.5,62.5

## Text inside footprints (layer, text, board x,y; h text height)
C3: Bottom Overlay "+" at 82.233,81.025 h1.2 r180
C8: Bottom Overlay "+" at 82.233,73.913 h1.2 r180
C9: Bottom Overlay "+" at 74.929,81.343 h1.2 r90
U1: Mechanical 13 "CUTOUT POLYGON" at 77.089,61.214 h0.25 r180; Mechanical 13 "ANTENNA AREA" at 77.089,60.706 h0.25 r180